# EAGLE board pcbremote (EAGLE 9.6.2)
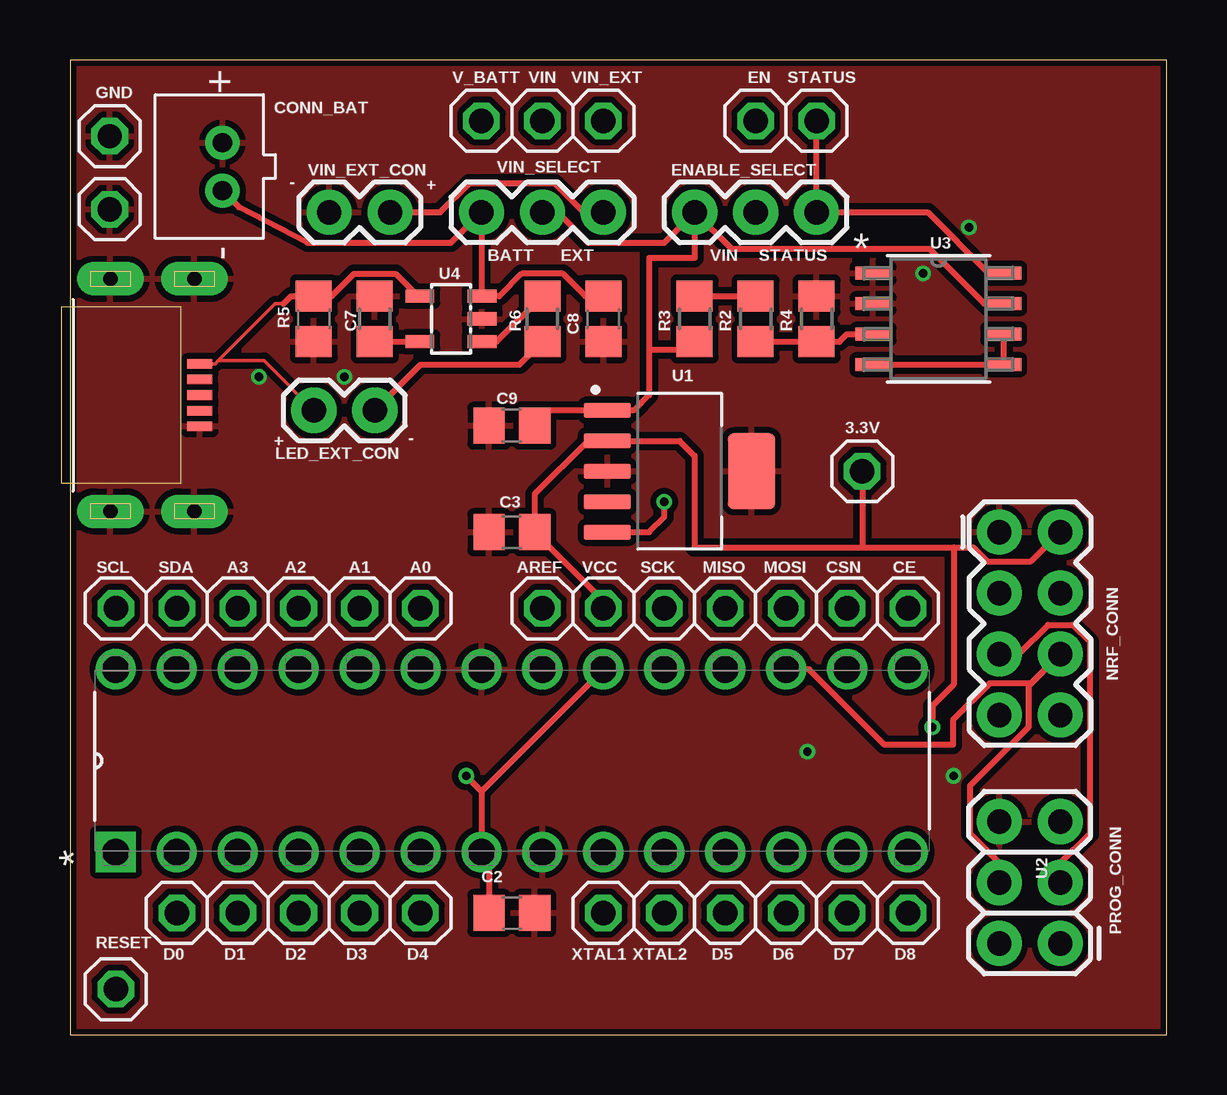
[diagram p0: board, top side]
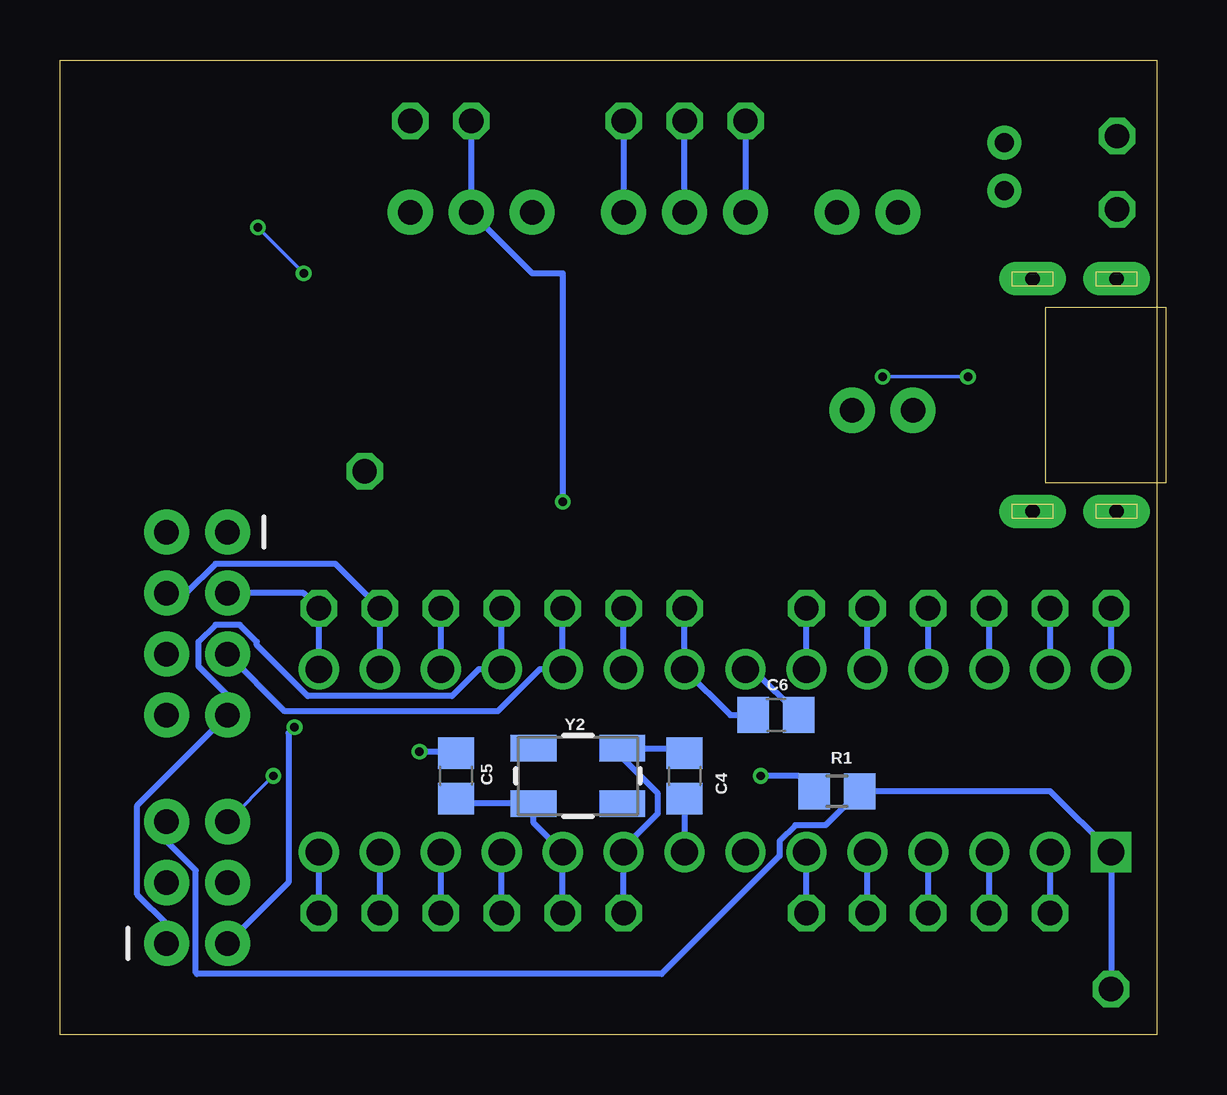
[diagram p1: board, bottom side, seen from below]

Size 45.72 x 40.64 mm. Coordinates in mm from the lower left corner, seen from the top.
Outline: 0,0 45.72,0 45.72,40.64 0,40.64 0,0
Copper layers (1*16): Top 0.035mm / dielectric 1.5mm / Bottom 0.035mm
Design rules "PCBWay_2layer": minimum track width 6mil, minimum drill 0.3mm, track to track 6mil, track to pad 6mil, pad to pad 6mil, via to via 6mil, smd to smd 4mil, copper to edge 10mil, drill to drill 6mil, minimum pad ring 6mil, minimum via ring 6mil, stop-mask expansion 4mil, vias tented up to drill 0.8mm, thermal gap 10mil

## Footprints (pad centres in the part's own frame; a part is rotated, then mirrored left to right if it is on the bottom)
1X01 = drill 1.016 octagon: 1 0,0
C0805 = smd 1.3 x 1.5: 1 -0.95,0; 2 0.95,0
JST-PH-2-THM = drill 0.8 pad 1.422: 1 1,0; 2 -1,0
1X03 = drill 1.016 pad 1.88: 1 0,0; 2 2.54,0; 3 5.08,0
1X02 = drill 1.016 pad 1.88: 1 0,0; 2 2.54,0
2X4 = drill 1.016 pad 1.88: 1 -3.81,-1.27; 2 -3.81,1.27; 3 -1.27,-1.27; 4 -1.27,1.27; 5 1.27,-1.27; 6 1.27,1.27; 7 3.81,-1.27; 8 3.81,1.27
2X3 = drill 1.016 pad 1.88: 1 0,0; 2 0,2.54; 3 2.54,0; 4 2.54,2.54; 5 5.08,0; 6 5.08,2.54
R0805 = smd 1.3 x 1.5: 1 -0.95,0; 2 0.95,0
SOT127P706X180-6N = smd 1.97 x 0.62: 1 -3.005,2.54; 2 -3.005,1.27; 3 -3.005,0; 4 -3.005,-1.27; 5 -3.005,-2.54 | smd 1.97 x 3.16: 6 3.005,0
DIP254P762X457-28 = drill 1.118 square: 1 -7.62,33.02 | drill 1.118: 2 -7.62,30.48; 3 -7.62,27.94; 4 -7.62,25.4; 5 -7.62,22.86; 6 -7.62,20.32; 7 -7.62,17.78; 8 -7.62,15.24; 9 -7.62,12.7; 10 -7.62,10.16; 11 -7.62,7.62; 12 -7.62,5.08; 13 -7.62,2.54; 14 -7.62,0; 15 0,0; 16 0,2.54; 17 0,5.08; 18 0,7.62; 19 0,10.16; 20 0,12.7; 21 0,15.24; 22 0,17.78; 23 0,20.32; 24 0,22.86; 25 0,25.4; 26 0,27.94; 27 0,30.48; 28 0,33.02
SO-8_S_LIT = smd 1.46 x 0.533: 1 -2.724,1.905; 2 -2.724,0.635; 3 -2.724,-0.635; 4 -2.724,-1.905; 5 2.724,-1.905; 6 2.724,-0.635; 7 2.724,0.635; 8 2.724,1.905
SOT23-5L = smd 0.55 x 1.2: 1 -0.95,-1.3; 2 0,-1.3; 3 0.95,-1.3; 4 0.95,1.3; 5 -0.95,1.3
MICRO-USB-2 = smd 0.4 x 1.05: 1 -1.3,5.275; 2 -0.65,5.275; 3 0,5.275; 4 0.65,5.275; 5 1.3,5.275 | drill 0.6 pad 1.4 long: P$1 -4.85,5.05; P$2 -4.85,1.55; P$3 4.85,5.05; P$4 4.85,1.55
CRYSTAL-SMD-5X3.2-4PAD = smd 1.9 x 1.1: 1 -1.85,-1.15; 2 1.85,-1.15; 3 1.85,1.15; 4 -1.85,1.15

## Placement (x,y rotation side)
3.3V  [1X01]  33.02,23.5 0 top
A0  [1X01]  14.61,17.78 180 top
A1  [1X01]  12.06,17.78 180 top
A2  [1X01]  9.53,17.78 180 top
A3  [1X01]  6.99,17.78 180 top
AREF  [1X01]  19.68,17.78 180 top
C2  .1u  [C0805]  18.41,5.08 0 top
C3  .1u  [C0805]  18.41,20.95 180 top
C4  22p  [C0805]  19.68,10.79 270 bottom
C5  22p  [C0805]  29.21,10.79 90 bottom
C6  .1u  [C0805]  15.88,13.34 0 bottom
C7  4.7u  [C0805]  10.16,29.84 270 top
C8  4.7u  [C0805]  22.23,29.84 270 top
C9  10u  [C0805]  18.41,25.4 180 top
CE  [1X01]  34.92,17.78 180 top
CONN_BAT  SOCKET 1x2  [JST-PH-2-THM]  6.35,36.2 90 top
CSN  [1X01]  32.38,17.78 180 top
D0  [1X01]  4.45,5.08 180 top
D1  [1X01]  6.99,5.08 180 top
D2  [1X01]  9.53,5.08 180 top
D3  [1X01]  12.06,5.08 180 top
D4  [1X01]  14.61,5.08 180 top
D5  [1X01]  27.3,5.08 180 top
D6  [1X01]  29.84,5.08 180 top
D7  [1X01]  32.38,5.08 180 top
D8  [1X01]  34.92,5.08 180 top
EN  [1X01]  28.57,38.1 0 top
ENABLE_SELECT  MALE 1x3  [1X03]  31.11,34.29 180 top
GND  [1X01]  1.65,34.42 0 top
GND7  [1X01]  1.65,37.47 0 top
LED_EXT_CON  FEMALE 1x2  [1X02]  12.7,26.04 180 top
MISO  [1X01]  27.3,17.78 180 top
MOSI  [1X01]  29.84,17.78 180 top
NRF_CONN  FEMALE 2x4  [2X4]  40.01,17.14 270 top
PROG_CONN  FEMALE 2x3  [2X3]  41.27,3.81 90 top
R1  10k  [R0805]  13.34,10.16 0 bottom
R2  2.26Meg  [R0805]  28.57,29.84 270 top
R3  0  [R0805]  26.04,29.84 270 top
R4  1.18Meg  [R0805]  31.11,29.84 270 top
R5  2k  [R0805]  12.7,29.84 90 top
R6  470  [R0805]  19.68,29.84 270 top
RESET  [1X01]  1.91,1.91 0 top
SCK  [1X01]  24.77,17.78 180 top
SCL  [1X01]  1.91,17.78 180 top
SDA  [1X01]  4.45,17.78 180 top
STATUS  [1X01]  31.11,38.1 0 top
U1  TPS73233DCQR  [SOT127P706X180-6N]  25.4,23.5 0 top
U2  ATMEGA328P-PU  [DIP254P762X457-28]  34.92,15.24 90 top
U3  LTC1540CS8PBF  [SO-8_S_LIT]  36.2,29.84 0 top
U4  MCP73831/OT  [SOT23-5L]  15.88,29.84 90 top
USB  MICRO-USBV2  [MICRO-USB-2]  0.13,26.67 270 top
V_BATT  [1X01]  17.14,38.1 0 top
VCC  [1X01]  22.23,17.78 180 top
VIN  [1X01]  19.68,38.1 0 top
VIN_EXT  [1X01]  22.23,38.1 0 top
VIN_EXT_CON  FEMALE 1x2  [1X02]  10.79,34.29 0 top
VIN_SELECT  MALE 1x3  [1X03]  17.14,34.29 0 top
XTAL1  [1X01]  22.23,5.08 180 top
XTAL2  [1X01]  24.77,5.08 180 top
Y2  8MHz  [CRYSTAL-SMD-5X3.2-4PAD]  24.13,10.79 180 bottom

## Library data of the parts
3.3V A0 A1-A3 AREF CE CSN D0 D1-D8 EN GND GND7 MISO MOSI RESET SCK SCL SDA STATUS V_BATT VCC VIN VIN_EXT XTAL1 XTAL2 = pinhead
C2-C9 = rcl; SPICEPREFIX: C
CONN_BAT U4 = adafruit
ENABLE_SELECT VIN_SELECT = SparkFun-Connectors; PROD_ID: XXX-00000
LED_EXT_CON VIN_EXT_CON = SparkFun-Retired
NRF_CONN = SparkFun-Connectors
PROG_CONN = SparkFun-Connectors; PROD_ID: CONN-11566
R1-R6 = rcl; SPICEPREFIX: R
U1 = TPS73233DCQR; DESCRIPTION: 250-mA, high-accuracy, ultra-low-dropout voltage regulator with reverse current protection & enable 6-SOT-223 -40 to 125; DIGI-KEY_PART_NUMBER: 296-16866-1-ND; MF: Texas Instruments; MP: TPS73233DCQR; PACKAGE: SOT-223-6 Texas Instruments; PURCHASE-URL: https://pricing.snapeda.com/search/part/TPS73233DCQR/?ref=eda
U2 = Atmel_By_element14_Batch_1-00; MPN: ATMEGA328P-PU; OC_FARNELL: 1715487; OC_NEWARK: 15R0268; PACKAGE: PDIP-28; SUPPLIER: Atmel
U3 = LTC_1450; BUILT_BY: EMA_UL_Team; MANUFACTURER_PART_NUMBER: ltc1540cs8#pbf; SOURCELIBRARY: LinearTech_2016_03_08; VENDOR: Linear Technology
USB = microusb
Y2 = SparkFun-Clocks; PROD_ID: XTAL-09431

## Nets
3.3V: 3.3V.1 C2.1 C3.1 NRF_CONN.2 PROG_CONN.2 R1.1 U1.2 U2.7 U2.20 VCC.1
A0: A0.1 U2.23
A1: A1.1 U2.24
A2: A2.1 U2.25
A3: A3.1 U2.26
AREF: AREF.1 C6.1 U2.21
CE: CE.1 NRF_CONN.3 U2.15
CSN: CSN.1 NRF_CONN.4 U2.16
D0: D0.1 U2.2
D1: D1.1 U2.3
D2: D2.1 U2.4
D3: D3.1 U2.5
D4: D4.1 U2.6
D5: D5.1 U2.11
D6: D6.1 U2.12
D7: D7.1 U2.13
D8: D8.1 U2.14
GND: C2.2 C3.2 C4.2 C5.2 C6.2 C7.2 C8.2 C9.2 CONN_BAT.1 GND7.1 GND.1 NRF_CONN.1 PROG_CONN.6 R4.1 R5.2 U1.3 U1.6 U2.8 U2.22 U3.1 U3.2 U4.2 USB.5 USB.P$1 USB.P$2 USB.P$3 USB.P$4 VIN_EXT_CON.1
MISO: MISO.1 NRF_CONN.7 PROG_CONN.1 U2.18
MOSI: MOSI.1 NRF_CONN.6 PROG_CONN.4 U2.17
N$1: R2.2 R4.2 U3.3
N$2: R2.1 R3.1
N$3: R5.1 U4.5
N$4: R6.1 U4.1
N$5: LED_EXT_CON.1 R6.2
N$8: EN.1 ENABLE_SELECT.2 U1.5
REF: U3.4 U3.5 U3.6
RST: PROG_CONN.5 R1.2 RESET.1 U2.1
SCK: NRF_CONN.5 PROG_CONN.3 SCK.1 U2.19
SCL: SCL.1 U2.28
SDA: SDA.1 U2.27
STATUS: ENABLE_SELECT.1 STATUS.1 U3.8
V_BATT: C8.1 CONN_BAT.2 U4.3 V_BATT.1 VIN_SELECT.1
V_EXT: VIN_EXT.1 VIN_EXT_CON.2 VIN_SELECT.3
V_USB: C7.1 LED_EXT_CON.2 U4.4 USB.1
VIN: C9.1 ENABLE_SELECT.3 R3.2 U1.1 U3.7 VIN.1 VIN_SELECT.2
XTAL1: C4.1 U2.9 XTAL1.1 Y2.1
XTAL2: C5.1 U2.10 XTAL2.1 Y2.3

## Tracks (layer width: path | path; a pad name or v marks a point on that pad's centre or on a via)
3.3V  (via drill 0.35)
  Top 0.254: 17.14,10.16 U2.20 | C2.1 17.46,7.3 U2.7 17.14,10.16 | v16.51,10.79 17.14,10.16 | VCC.1 22.23,18.09 C3.1 19.36,22.54 21.59,24.77 U1.2 25.4,24.77 26.04,24.13 26.04,20.32 33.02,20.32 | NRF_CONN.2 40.06,19.74 38.23,19.74 37.65,20.32 36.83,20.32 | 33.02,20.32 36.83,20.32 | v35.94,12.83 35.94,13.72 36.83,14.61 36.83,20.32 | 3.3V.1 33.02,20.32
  Bottom 0.254: U2.20 VCC.1 | R1.1 14.92,10.79 v16.51,10.79 | v35.94,12.83 36.2,12.57 36.2,6.35 PROG_CONN.2
A0
  Bottom 0.254: U2.23 A0.1
A1
  Bottom 0.254: U2.24 A1.1
A2
  Bottom 0.254: U2.25 A2.1
A3
  Bottom 0.254: U2.26 A3.1
AREF
  Bottom 0.254: AREF.1 U2.21 17.78,13.34 C6.1
CE
  Bottom 0.254: U2.15 CE.1 35.56,18.41 NRF_CONN.3
CSN
  Bottom 0.254: U2.16 CSN.1 34.24,19.63 39.24,19.63 40.46,18.41 NRF_CONN.4
D0
  Bottom 0.254: D0.1 U2.2
D1
  Bottom 0.254: D1.1 U2.3
D2
  Bottom 0.254: D2.1 U2.4
D3
  Bottom 0.254: D3.1 U2.5
D4
  Bottom 0.254: D4.1 U2.6
D5
  Bottom 0.254: D5.1 U2.11
D6
  Bottom 0.254: D6.1 U2.12
D7
  Bottom 0.254: D7.1 U2.13
D8
  Bottom 0.254: D8.1 U2.14
GND  (via drill 0.35)
  Bottom 0.152: PROG_CONN.6 v36.83,10.79 | v11.43,27.43 v7.87,27.43 | v35.56,31.75 v37.47,33.66
  Bottom 0.254: C4.2 U2.8 | C6.2 16.83,15.24 U2.22 | v30.73,11.81 29.28,11.81 C5.2
  pour Top (isolate 0.254): -0.64,41.27 -0.64,-0.64 46.35,-0.64 46.35,41.27
MISO
  Bottom 0.254: MISO.1 U2.18 28.26,15.24 29.38,14.12 35.39,14.12 37.52,16.25 37.52,16.38 38.23,17.09 39.24,17.09 39.95,16.38 39.95,15.37 38.73,14.15 NRF_CONN.7 42.49,9.58 42.49,5.84 41.27,4.63 PROG_CONN.1
MOSI
  Top 0.254: U2.17 30.8,15.24 33.95,12.09 36.8,12.09 36.8,13.13 38.33,14.66 40.06,14.66 NRF_CONN.6 39.95,14.55 39.95,12.83 37.52,10.39 37.52,8.38 38.73,7.17 PROG_CONN.4
  Bottom 0.254: U2.17 MOSI.1
N$1
  Top 0.254: R2.2 R4.2 32.07,28.89 32.38,29.21 U3.3
N$2
  Top 0.254: R3.1 R2.1
N$3
  Top 0.254: U4.5 14.57,28.92 14.55,28.89 R5.1
N$4
  Top 0.254: R6.1 17.79,28.89 U4.1
N$5
  Top 0.254: LED_EXT_CON.1 14.61,27.94 18.73,27.94 R6.2
N$8  (via drill 0.35)
  Top 0.254: U1.5 24.13,20.95 24.77,21.59 v24.77,22.23
  Bottom 0.254: v24.77,22.23 24.77,31.75 26.04,31.75 ENABLE_SELECT.2 EN.1
REF
  Top 0.254: U3.4 U3.5 U3.6
RST
  Bottom 0.254: PROG_CONN.5 41.27,8.07 40.06,6.86 40.06,2.59 40.01,2.54 20.64,2.54 15.72,7.46 15.72,8.08 15.07,8.74 13.81,8.74 R1.2 4.45,10.16 U2.1 RESET.1
SCK
  Top 0.254: PROG_CONN.3 41.27,7.17 42.49,8.38 42.49,16.38 41.78,17.09 40.77,17.09 39.55,15.88 NRF_CONN.5
  Bottom 0.254: SCK.1 U2.19 25.72,15.24 27.48,13.49 36.35,13.49 NRF_CONN.5
SCL
  Bottom 0.254: U2.28 SCL.1
SDA
  Bottom 0.254: U2.27 SDA.1
STATUS
  Top 0.254: U3.8 38.28,31.75 35.74,34.29 ENABLE_SELECT.1 STATUS.1
V_BATT
  Top 0.254: C8.1 21.48,30.8 20.55,31.72 18.82,31.72 17.89,30.8 U4.3 17.14,30.82 VIN_SELECT.1 15.88,33.02 9.89,33.02 7.04,34.5 CONN_BAT.2
  Bottom 0.254: V_BATT.1 VIN_SELECT.1
V_EXT
  Top 0.254: VIN_EXT_CON.2 15.42,34.29 16.64,35.51 20.19,35.51 21.41,34.29 VIN_SELECT.3
  Bottom 0.254: VIN_EXT.1 VIN_SELECT.3
V_USB
  Top 0.152: 6.18,28.11 8.55,30.48 8.89,30.48 | 6.18,28.11 6.04,27.97 USB.1 | 6.18,28.11 8.08,28.11 LED_EXT_CON.2
  Top 0.254: U4.4 14.49,30.8 13.57,31.72 11.83,31.72 10.9,30.8 C7.1 9.21,30.8 8.89,30.48
VIN
  Top 0.254: VIN_SELECT.2 20,34.61 21.59,33.02 24.77,33.02 ENABLE_SELECT.3 | C9.1 20,26.04 U1.1 23.5,26.04 24.13,26.67 24.13,28.57 | ENABLE_SELECT.3 27.56,32.77 35.81,32.77 38.1,30.48 U3.7 | ENABLE_SELECT.3 26.04,32.38 24.13,32.38 24.13,28.57 | 24.13,28.57 25.71,28.57 R3.2
  Bottom 0.254: VIN_SELECT.2 VIN.1
XTAL1
  Bottom 0.254: XTAL1.1 U2.9 22.23,7.8 20.8,9.23 20.8,10.06 22.28,11.54 Y2.1 19.89,11.95 C4.1
XTAL2
  Bottom 0.254: XTAL2.1 U2.10 25.98,8.84 Y2.3 29.01,9.64 C5.1

## Text on the board
tNames: - | + | BATT | EXT | VIN | STATUS | + | -